# Altium PCB ui_layout-v1.0.0.PcbDoc
Units mm, origin at the board's own origin, x right, y up, seen from the top; angles counter-clockwise.
Board outline 78.99 x 48 mm, 2 copper layers (Top Layer, Bottom Layer); 45 components, 52 nets, 161 pads, 29 vias.
Unrouted connection lines stored in the file: 9.
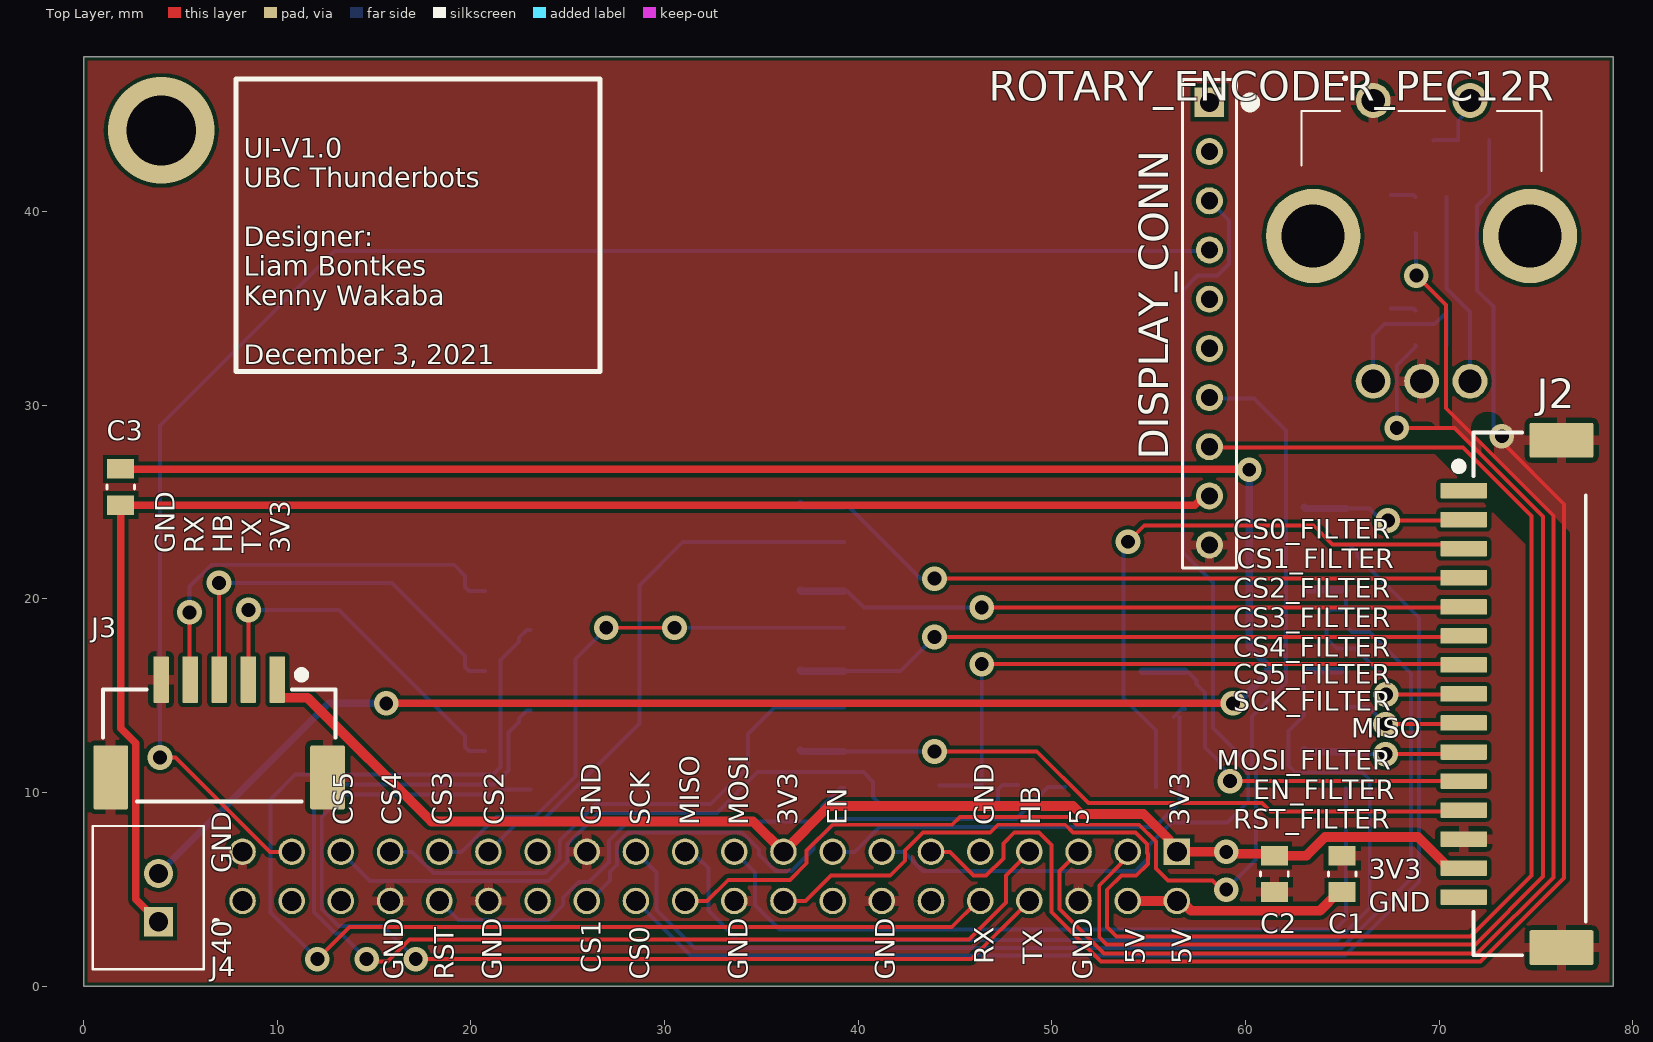
[diagram p0: Top Layer view]
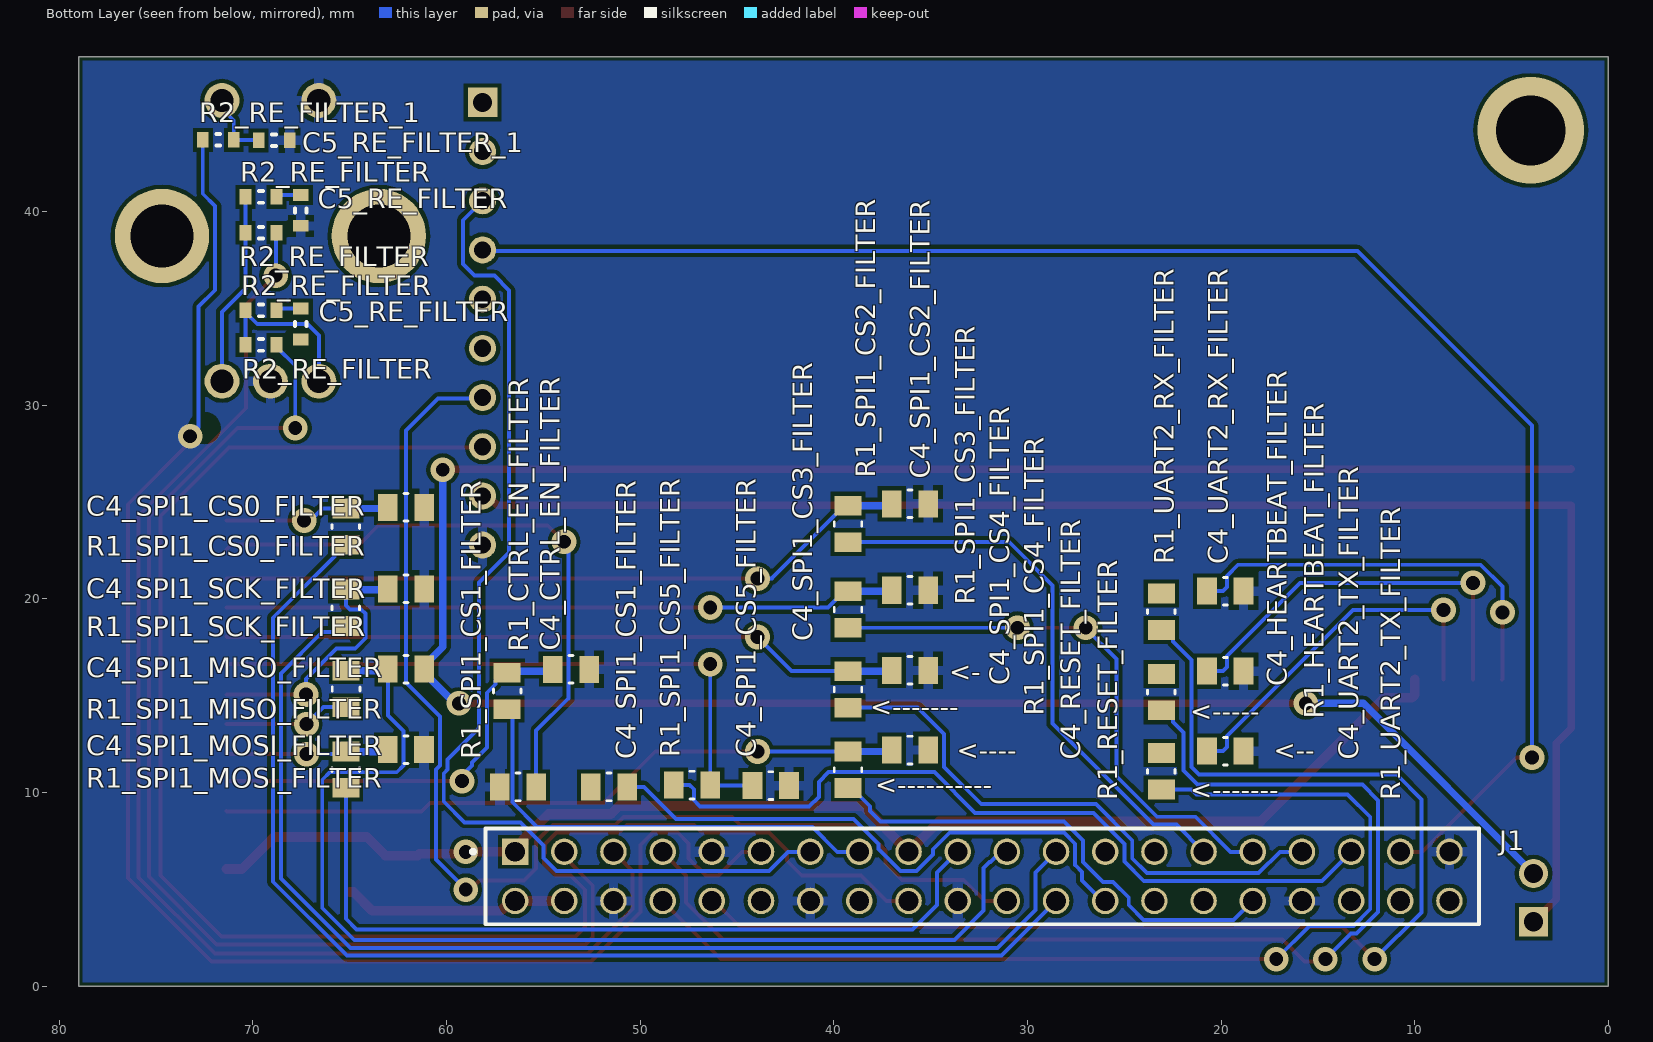
[diagram p1: Bottom Layer view, seen from below]
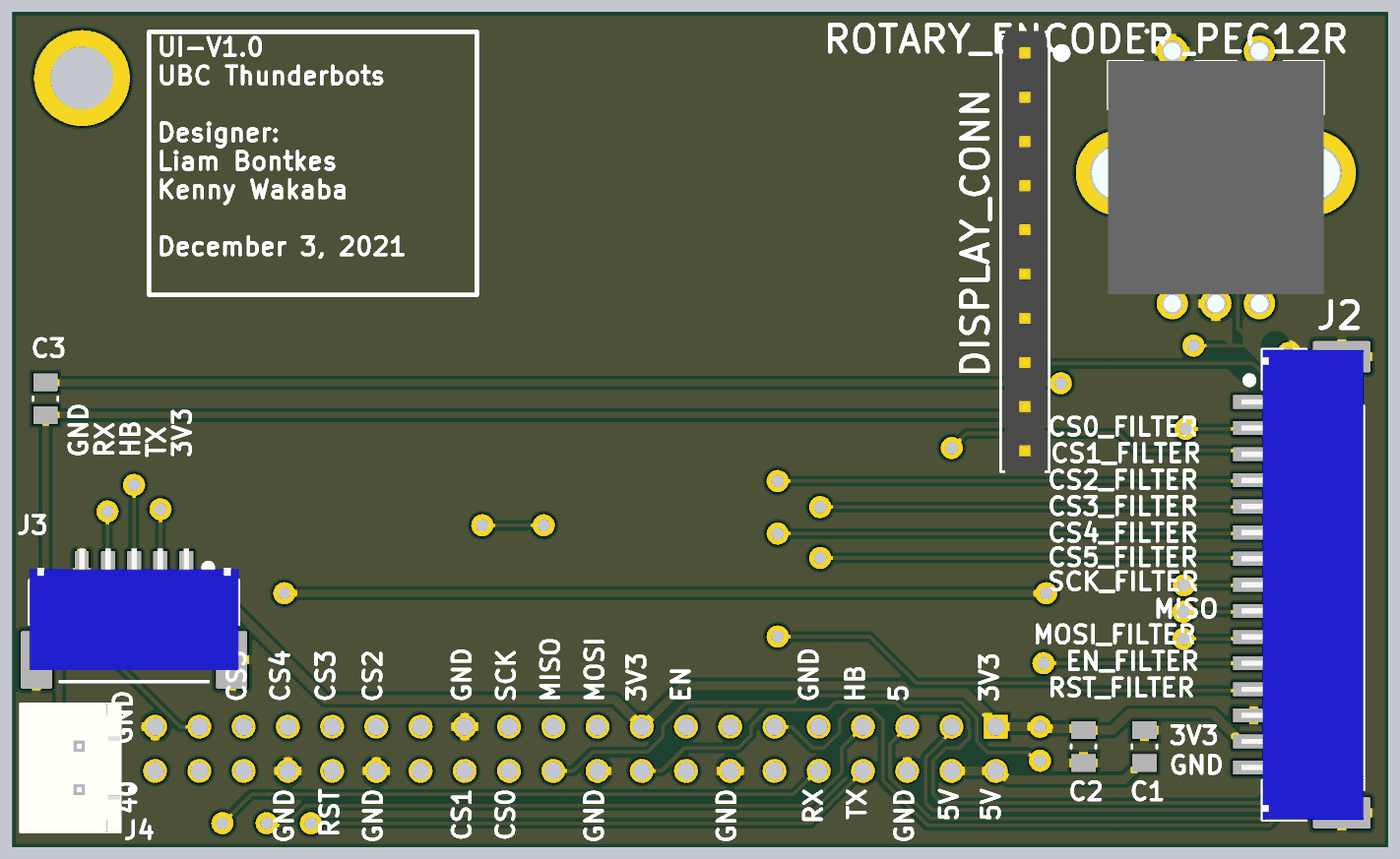
[diagram p2: 3D render of the assembled board from above, using the file's embedded part models]

## Layer stack, top to bottom
Top Solder: solder mask 0.0102, Solder Resist, Dk 3.5
Top Layer: signal copper 0.0356
Dielectric 1: dielectric 0.32, FR-4, Dk 4.8
Bottom Layer: signal copper 0.0356
Bottom Solder: solder mask 0.0102, Solder Resist, Dk 3.5

## Board outline
0,0 0,48 78.994,48 78.994,0

## Design rules (kind name [scope] priority, off if disabled: settings)
BoardOutlineClearance [All] p1: gap=0.2 ignorepadtopadclearanceinfootprint=FALSE except(0.4: Arc-SplitBarrior Arc-SplitContinuation Track-SplitBarrior Track-SplitContinuation SMDPad-SplitBarrior SMDPad-SplitContinuation THPad-SplitBarrior THPad-SplitContinuation Via-SplitBarrior Via-SplitContinuation Fill-SplitBarrior Fill-SplitContinuation Poly-SplitBarrior Poly-SplitContinuation Region-SplitBarrior Region-SplitContinuation Text-SplitBarrior Text-SplitContinuation)
Clearance "Clearance Bottom Layer" [OnLayer('Bottom Layer')] p1: gap=0.203 ignorepadtopadclearanceinfootprint=TRUE except(0.254: Arc-Text Track-Text SMDPad-Text THPad-Text Via-Text Fill-Text Poly-Text Region-Text Text-Text)
Clearance "Clearance Top Layer" [OnLayer('Top Layer')] p2: gap=0.203 ignorepadtopadclearanceinfootprint=TRUE except(0.254: Arc-Text Track-Text SMDPad-Text THPad-Text Via-Text Fill-Text Poly-Text Region-Text Text-Text)
Clearance [All] p3: gap=0.2 ignorepadtopadclearanceinfootprint=TRUE except(0.089: Arc-Arc Arc-Track Arc-SMDPad Track-Track Track-SMDPad SMDPad-SMDPad; 0.127: Arc-Via Track-Via SMDPad-Via THPad-Via Via-Via; 0.254: Arc-Text Track-Text SMDPad-Text THPad-Text Via-Text Fill-Text Poly-Text Region-Text Text-Text)
HoleSize [All] p1: absolutevalues=TRUE maxlimit=6.3 minlimit=0.2 maxpercent=80.000 minpercent=20.000
MinimumAnnularRing [All] p1: minimumring=0.076
MinimumSolderMaskSliver [All] p1: minsoldermaskwidth=0.1
PolygonConnect PolygonConnect_1 [All] p1: thpad.connectstyle=Relief thpad.reliefconductorwidth=0.508 thpad.reliefentries=4 thpad.polygonreliefangle="90 Angle" thpad.airgapwidth=0.254 smdpad.connectstyle=Relief smdpad.reliefconductorwidth=0.508 smdpad.reliefentries=4 smdpad.polygonreliefangle="90 Angle" smdpad.airgapwidth=0.254 via.connectstyle=Direct via.reliefconductorwidth=0.508 via.reliefentries=4 via.polygonreliefangle="90 Angle" via.airgapwidth=0.254
RoomDefinition U_motordriver [InComponentClass('U_motordriver')] p1: confinementstyle=ConfineIn formatcopy=TRUE lockcomponents=FALSE outline 69.621,0.381 69.621,27.989 78.629,27.989 78.629,0.381
RoomDefinition SPI1_CS0_FILTER [InComponentClass('SPI1_CS0_FILTER')] p2: confinementstyle=ConfineIn formatcopy=TRUE lockcomponents=FALSE outline 60.1,21.766 66.4,21.766 66.4,25.908 60.1,25.908
RoomDefinition ROTARY_ENCODER_FILTER [InComponentClass('ROTARY_ENCODER_FILTER')] p3: confinementstyle=ConfineIn formatcopy=TRUE lockcomponents=FALSE outline 73.241,44.501 66.739,44.501 66.739,32.372 73.241,32.372
RoomDefinition U_jetson-nano [InComponentClass('U_jetson-nano')] p4: confinementstyle=ConfineIn formatcopy=TRUE lockcomponents=FALSE outline 6.1,2.6 66.2,2.6 66.2,8.7 6.1,8.7
RoomDefinition RESET_FILTER [InComponentClass('RESET_FILTER')] p5: confinementstyle=ConfineIn formatcopy=TRUE lockcomponents=FALSE outline 34.055,9.169 40.455,9.169 40.455,13.276 34.055,13.276
RoomDefinition UART2_TX_FILTER [InComponentClass('UART2_TX_FILTER')] p6: confinementstyle=ConfineIn formatcopy=TRUE lockcomponents=FALSE outline 17.747,9.182 24.247,9.182 24.247,13.139 17.747,13.139
RoomDefinition SPI1_CS4_FILTER [InComponentClass('SPI1_CS4_FILTER')] p7: confinementstyle=ConfineIn formatcopy=TRUE lockcomponents=FALSE outline 34.06,13.346 40.46,13.346 40.46,17.537 34.06,17.537
RoomDefinition HEARTBEAT_FILTER [InComponentClass('HEARTBEAT_FILTER')] p8: confinementstyle=ConfineIn formatcopy=TRUE lockcomponents=FALSE outline 17.749,13.272 24.249,13.272 24.249,17.268 17.749,17.268
RoomDefinition UART2_RX_FILTER [InComponentClass('UART2_RX_FILTER')] p9: confinementstyle=ConfineIn formatcopy=TRUE lockcomponents=FALSE outline 17.782,17.321 24.282,17.321 24.282,21.478 17.782,21.478
RoomDefinition SPI1_CS3_FILTER [InComponentClass('SPI1_CS3_FILTER')] p10: confinementstyle=ConfineIn formatcopy=TRUE lockcomponents=FALSE outline 34.06,17.588 40.46,17.588 40.46,21.754 34.06,21.754
RoomDefinition SPI1_CS2_FILTER [InComponentClass('SPI1_CS2_FILTER')] p11: confinementstyle=ConfineIn formatcopy=TRUE lockcomponents=FALSE outline 34.055,21.932 40.455,21.932 40.455,25.848 34.055,25.848
RoomDefinition SPI1_CS5_FILTER [InComponentClass('SPI1_CS5_FILTER')] p12: confinementstyle=ConfineIn formatcopy=TRUE lockcomponents=FALSE outline 41.25,9.119 49.326,9.119 49.326,11.582 41.25,11.582
RoomDefinition SPI1_CS1_FILTER [InComponentClass('SPI1_CS1_FILTER')] p13: confinementstyle=ConfineIn formatcopy=TRUE lockcomponents=FALSE outline 58.191,11.519 49.708,11.519 49.708,9.119 58.191,9.119
RoomDefinition SPI1_MOSI_FILTER [InComponentClass('SPI1_MOSI_FILTER')] p14: confinementstyle=ConfineIn formatcopy=TRUE lockcomponents=FALSE outline 60.08,9.216 66.38,9.216 66.38,13.284 60.08,13.284
RoomDefinition CTRL_EN_FILTER [InComponentClass('CTRL_EN_FILTER')] p15: confinementstyle=ConfineIn formatcopy=TRUE lockcomponents=FALSE outline 51.562,13.335 58.062,13.335 58.062,17.46 51.562,17.46
RoomDefinition SPI1_MISO_FILTER [InComponentClass('SPI1_MISO_FILTER')] p16: confinementstyle=ConfineIn formatcopy=TRUE lockcomponents=FALSE outline 60.096,13.326 66.396,13.326 66.396,17.501 60.096,17.501
RoomDefinition SPI1_SCK_FILTER [InComponentClass('SPI1_SCK_FILTER')] p17: confinementstyle=ConfineIn formatcopy=TRUE lockcomponents=FALSE outline 60.095,17.564 66.395,17.564 66.395,21.692 60.095,21.692
RoomDefinition U_power [InComponentClass('U_power')] p18: confinementstyle=ConfineIn formatcopy=TRUE lockcomponents=FALSE outline 0.254,0.278 9.354,0.278 9.354,28.678 0.254,28.678
RoutingCorners [All] p1: cornerstyle=Round minsetback=2.54 maxsetback=2.54
RoutingVias [All] p1: holewidth=0.5 width=1 viastyle="Through Hole" minholewidth=0.2 minwidth=0.45 maxholewidth=1 maxwidth=2
SilkToSilkClearance [All] p1: silktosilkclearance=0.1
SilkToSolderMaskClearance [IsPad] p1: minsilkscreentomaskgap=0.1 clearancetoexposedcopper=TRUE
SolderMaskExpansion [All] p1: expansion=0.102 istentingtop=FALSE
Width [All] p1: maxlimit=2.54 minlimit=0.089 preferedwidth=0.381
25 further rules are at their usual default settings.

## Classes and differential pairs
component class ROTARY_ENCODER_FILTER: C5_RE_FILTER C5_RE_FILTER_1 R2_RE_FILTER R2_RE_FILTER_1
component class "ROTARY ENCODER": ROTARY_ENCODER_PEC12R
channel class low-pass-filter: CTRL_EN_FILTER HEARTBEAT_FILTER RESET_FILTER SPI1_CS0_FILTER SPI1_CS1_FILTER SPI1_CS2_FILTER SPI1_CS3_FILTER SPI1_CS4_FILTER SPI1_CS5_FILTER SPI1_MISO_FILTER SPI1_MOSI_FILTER SPI1_SCK_FILTER UART2_RX_FILTER UART2_TX_FILTER
component class UART2_TX_FILTER: C4_UART2_TX_FILTER R1_UART2_TX_FILTER
component class UART2_RX_FILTER: C4_UART2_RX_FILTER R1_UART2_RX_FILTER
component class U_power: C3 J3 J4
component class U_jetson-nano: C1 C2 J1
component class SPI1_SCK_FILTER: C4_SPI1_SCK_FILTER R1_SPI1_SCK_FILTER
component class SPI1_MOSI_FILTER: C4_SPI1_MOSI_FILTER R1_SPI1_MOSI_FILTER
component class SPI1_MISO_FILTER: C4_SPI1_MISO_FILTER R1_SPI1_MISO_FILTER
component class SPI1_CS5_FILTER: C4_SPI1_CS5_FILTER R1_SPI1_CS5_FILTER
component class SPI1_CS4_FILTER: C4_SPI1_CS4_FILTER R1_SPI1_CS4_FILTER
component class SPI1_CS3_FILTER: C4_SPI1_CS3_FILTER R1_SPI1_CS3_FILTER
component class SPI1_CS2_FILTER: C4_SPI1_CS2_FILTER R1_SPI1_CS2_FILTER
component class SPI1_CS1_FILTER: C4_SPI1_CS1_FILTER R1_SPI1_CS1_FILTER
component class SPI1_CS0_FILTER: C4_SPI1_CS0_FILTER R1_SPI1_CS0_FILTER
component class RESET_FILTER: C4_RESET_FILTER R1_RESET_FILTER
component class HEARTBEAT_FILTER: C4_HEARTBEAT_FILTER R1_HEARTBEAT_FILTER
component class CTRL_EN_FILTER: C4_CTRL_EN_FILTER R1_CTRL_EN_FILTER

## Components (designator, comment, footprint, x,y, rotation, side; value= is the part's Value field where it differs from the comment)
C1 "0.1uF 25V" 0805 65,5.8 r270 top value=0.1uF
C2 "0.1uF 25V" 0805 61.5,5.8 r90 top value=0.1uF
C3 "0.1uF 25V" 0805 1.905,25.781 r270 top value=0.1uF
C4_CTRL_EN_FILTER "100pF 16V" 0805 53.577,16.361 r0 bottom value=100pF (schematic designator C4)
C4_HEARTBEAT_FILTER "100pF 16V" 0805 19.78,16.269 r0 bottom value=100pF (schematic designator C4)
C4_RESET_FILTER "100pF 16V" 0805 36.066,12.196 r0 bottom value=100pF (schematic designator C4)
C4_SPI1_CS0_FILTER "100pF 16V" 0805 62.098,24.73 r0 bottom value=100pF (schematic designator C4)
C4_SPI1_CS1_FILTER "100pF 16V" 0805 56.312,10.287 r180 bottom value=100pF (schematic designator C4)
C4_SPI1_CS2_FILTER "100pF 16V" 0805 36.066,24.913 r0 bottom value=100pF (schematic designator C4)
C4_SPI1_CS3_FILTER "100pF 16V" 0805 36.066,20.449 r0 bottom value=100pF (schematic designator C4)
C4_SPI1_CS4_FILTER "100pF 16V" 0805 36.066,16.307 r0 bottom value=100pF (schematic designator C4)
C4_SPI1_CS5_FILTER "100pF 16V" 0805 43.256,10.363 r0 bottom value=100pF (schematic designator C4)
C4_SPI1_MISO_FILTER "100pF 16V" 0805 62.093,16.372 r0 bottom value=100pF (schematic designator C4)
C4_SPI1_MOSI_FILTER "100pF 16V" 0805 62.103,12.217 r0 bottom value=100pF (schematic designator C4)
C4_SPI1_SCK_FILTER "100pF 16V" 0805 62.098,20.523 r0 bottom value=100pF (schematic designator C4)
C4_UART2_RX_FILTER "100pF 16V" 0805 19.78,20.402 r0 bottom value=100pF (schematic designator C4)
C4_UART2_TX_FILTER "100pF 16V" 0805 19.78,12.136 r0 bottom value=100pF (schematic designator C4)
C5_RE_FILTER "Comment" 0603#1 67.526,34.2 r90 bottom
C5_RE_FILTER "Comment" 0603#2 67.526,40.067 r90 bottom
C5_RE_FILTER_1 "Comment" 0603#3 68.909,43.688 r0 bottom
DISPLAY_CONN "Comment" 1-87224-0_TYC 58.141,45.644 r90 top
J1 "CN HDR 40POS" "CN HDR 40POS 0.1 TH" 32.33,5.67 r0 bottom locked
J2 "Comment" "JST ZE SMT 15POS" 74.027,14.344 r90 top
J3 "CN HDR 5POS" "CN HDR 5POS SMD 1.5MM" 6.995,13.081 r0 top
J4 "CN HDR 2POS JST XH" JST_B2B-XH-A(LF)(SN) 3.332,4.572 r90 top
R1_CTRL_EN_FILTER "160" 0805 56.877,15.25 r270 bottom value=1 (schematic designator R1)
R1_HEARTBEAT_FILTER "160" 0805 23.08,15.183 r270 bottom value=1 (schematic designator R1)
R1_RESET_FILTER "160" 0805 39.266,11.179 r270 bottom value=1 (schematic designator R1)
R1_SPI1_CS0_FILTER "160" 0805 65.198,23.731 r270 bottom value=1 (schematic designator R1)
R1_SPI1_CS1_FILTER "160" 0805 51.612,10.287 r180 bottom value=1 (schematic designator R1)
R1_SPI1_CS2_FILTER "160" 0805 39.266,23.876 r270 bottom value=1 (schematic designator R1)
R1_SPI1_CS3_FILTER "160" 0805 39.266,19.451 r270 bottom value=1 (schematic designator R1)
R1_SPI1_CS4_FILTER "160" 0805 39.266,15.328 r270 bottom value=1 (schematic designator R1)
R1_SPI1_CS5_FILTER "160" 0805 47.32,10.389 r0 bottom value=1 (schematic designator R1)
R1_SPI1_MISO_FILTER "160" 0805 65.193,15.354 r270 bottom value=1 (schematic designator R1)
R1_SPI1_MOSI_FILTER "160" 0805 65.203,11.18 r270 bottom value=1 (schematic designator R1)
R1_SPI1_SCK_FILTER "160" 0805 65.198,19.544 r270 bottom value=1 (schematic designator R1)
R1_UART2_RX_FILTER "160" 0805 23.08,19.34 r270 bottom value=1 (schematic designator R1)
R1_UART2_TX_FILTER "160" 0805 23.08,11.099 r270 bottom value=1 (schematic designator R1)
R2_RE_FILTER "Comment" 0603#4 69.583,40.767 r180 bottom
R2_RE_FILTER "Comment" 0603#5 69.583,38.913 r180 bottom
R2_RE_FILTER "Comment" 0603#5 69.583,33.122 r180 bottom
R2_RE_FILTER "Comment" 0603#6 69.583,34.9 r180 bottom
R2_RE_FILTER_1 "Comment" 0603#7 71.793,43.713 r180 bottom
ROTARY_ENCODER_PEC12R "Comment" PEC12R4220FS0024 66.599,45.745 r0 top

## Footprints (in the part's own frame and the unit in brackets; to place one, negate y for a bottom-side part, rotate by r counter-clockwise, add the part's x,y. Pads: shape width x height; smd on the part's side, far side on the other; paste and mask are expansions set on the pad)
1-87224-0_TYC [mil]
  round 55 hole 35 mask+0: CARD_CD(-500,0) D/C(-600,0) GND(-900,0) MISO(-100,0) MOSI(-300,0) RESET(-700,0) SCK(-200,0) TFT_CS(-400,0) VCC(-800,0)
  rect 60x60 hole 38 mask+0: LITE(0,0)
  silkscreen extent -947,-93 47,55, body extent -950,-50 50,50, height 90
0603#1 [mm] "Chip Resistor, 2-Leads, Body 1.60x0.80mm, IPC High Density"
  rect 0.6x0.8 smd: 1(-0.8,0) C5(0.8,0)
  silkscreen extent -0.1,-0.3 0.1,0.3, body extent -0.8,-0.4 0.8,0.4, height 0.6
0603#2 [mm] "Chip Resistor, 2-Leads, Body 1.60x0.80mm, IPC High Density"
  rect 0.6x0.8 smd: 1(-0.8,0) C5-1(0.8,0)
  silkscreen extent -0.1,-0.3 0.1,0.3, body extent -0.8,-0.4 0.8,0.4, height 0.6
0603#3 [mm] "Chip Resistor, 2-Leads, Body 1.60x0.80mm, IPC High Density"
  rect 0.6x0.8 smd: 1(-0.8,0) C5-2(0.8,0)
  silkscreen extent -0.1,-0.3 0.1,0.3, body extent -0.8,-0.4 0.8,0.4, height 0.6
0603#4 [mm] "Chip Resistor, 2-Leads, Body 1.60x0.80mm, IPC High Density"
  rect 0.6x0.8 smd: 1(-0.8,0) R2-1(0.8,0)
  silkscreen extent -0.1,-0.3 0.1,0.3, body extent -0.8,-0.4 0.8,0.4, height 0.6
0603#5 [mm] "Chip Resistor, 2-Leads, Body 1.60x0.80mm, IPC High Density"
  rect 0.6x0.8 smd: 1(-0.8,0) 2(0.8,0)
  silkscreen extent -0.1,-0.3 0.1,0.3, body extent -0.8,-0.4 0.8,0.4, height 0.6
0603#6 [mm] "Chip Resistor, 2-Leads, Body 1.60x0.80mm, IPC High Density"
  rect 0.6x0.8 smd: 1(-0.8,0) R2(0.8,0)
  silkscreen extent -0.1,-0.3 0.1,0.3, body extent -0.8,-0.4 0.8,0.4, height 0.6
0603#7 [mm] "Chip Resistor, 2-Leads, Body 1.60x0.80mm, IPC High Density"
  rect 0.6x0.8 smd: 1(-0.8,0) R2-2(0.8,0)
  silkscreen extent -0.1,-0.3 0.1,0.3, body extent -0.8,-0.4 0.8,0.4, height 0.6
0805 [mil]
  rect 40x55 smd: 1(-37,0) 2(37,0)
  silkscreen extent -4,-28 4,28, body extent -47,-28 47,28, height 24
"CN HDR 5POS SMD 1.5MM" [mm] "Connector Header Surface Mount 5 position 0.059\" (1.50mm)"
  rrect10% 1.8x3.3 smd: 0(-5.6,-2.3) 0(5.6,-2.3)
  rrect10% 0.8x2.4 smd: 1(3,2.75) 2(1.5,2.75) 3(0,2.75) 4(-1.5,2.75) 5(-3,2.75)
  silkscreen extent -6,-3.55 6,3, body extent -6,-2.9 6,4.1, height 7.51
"CN HDR 40POS 0.1 TH" [mm] "40 Position Header Connector 0.100\" (2.54mm) Through Hole"
  rect 1.37x1.37 hole 1.02: 01(24.13,-1.27)
  round 1.37 hole 1.02: 02(24.13,1.27) 03(21.59,-1.27) 04(21.59,1.27) 05(19.05,-1.27) 06(19.05,1.27) 07(16.51,-1.27) 08(16.51,1.27) 09(13.97,-1.27) 10(13.97,1.27) 11(11.43,-1.27) "12 "(11.43,1.27) 13(8.89,-1.27) 14(8.89,1.27) 15(6.35,-1.27) 16(6.35,1.27) 17(3.81,-1.27) 18(3.81,1.27) 19(1.27,-1.27) 20(1.27,1.27) 21(-1.27,-1.27) 22(-1.27,1.27) 23(-3.81,-1.27) 24(-3.81,1.27) 25(-6.35,-1.27) 26(-6.35,1.27) 27(-8.89,-1.27) 28(-8.89,1.27) 29(-11.43,-1.27) 30(-11.43,1.27) 31(-13.97,-1.27) 32(-13.97,1.27) 33(-16.51,-1.27) 34(-16.51,1.27) 35(-19.05,-1.27) 36(-19.05,1.27) 37(-21.59,-1.27) 38(-21.59,1.27) 39(-24.13,-1.27) 40(-24.13,1.27)
  silkscreen extent -25.65,-2.48 26.4,2.47
"JST ZE SMT 15POS" [mm] "15 POS HDR JST ZE"
  rrect10% 1.8x3.3 smd: 0(-12.35,-2.3) 0(13.85,-2.3)
  rrect10% 0.8x2.4 smd: 1(11.25,2.75) 2(9.75,2.75) 3(8.25,2.75) 4(6.75,2.75) 5(5.25,2.75) 6(3.75,2.75) 7(2.25,2.75) 8(0.75,2.75) 9(-0.75,2.75) 10(-2.25,2.75) 11(-3.75,2.75) 12(-5.25,2.75) 13(-6.75,2.75) 14(-8.25,2.75) 15(-9.75,2.75)
  silkscreen extent -12.75,-3.55 14.26,3, body extent -12.75,-3.55 14.25,3.45, height 7.6
JST_B2B-XH-A(LF)(SN) [mm]
  rect 1.508x1.508 hole 1: 1(-1.25,-0.525)
  round 1.508 hole 1: 2(1.25,-0.525)
  silkscreen extent -3.7,-3.6 3.7,2.88, body extent -3.7,-2.85 3.7,2.9, height 7.1
PEC12R4220FS0024 [mm]
  round 1.8 hole 1.2: 1(0,0) 2(5,0) A1(0,-14.5) B1(5,-14.5) C1(2.5,-14.5)
  round 4.875 hole 3.25: MH1(8.1,-7) MH2(-3.1,-7)
  silkscreen extent -3.7,-3.65 8.7,1.2, body extent -4.61,-15 9.62,0.5, height 20.1

## Part data
C1 C2 C3: library part "CAP 0.1uF 25V", "Default Symbol for Capacitors", Operating Temperature="-55°C ~ 125°C", Rating=25V, Temperature Coefficient=X7R, Tolerance=10%, Part Number="CAP 0.1uF 25V"
C4_CTRL_EN_FILTER C4_HEARTBEAT_FILTER C4_RESET_FILTER C4_SPI1_CS0_FILTER C4_SPI1_CS1_FILTER C4_SPI1_CS2_FILTER C4_SPI1_CS3_FILTER C4_SPI1_CS4_FILTER C4_SPI1_CS5_FILTER C4_SPI1_MISO_FILTER C4_SPI1_MOSI_FILTER C4_SPI1_SCK_FILTER C4_UART2_RX_FILTER C4_UART2_TX_FILTER: library part "CAP 100pF 16V", "Default Symbol for Capacitors", Operating Temperature="-55°C ~ 125°C", Rating=16V, Temperature Coefficient=X5R, Tolerance=10%, Part Number="CAP 100pF 16V"
C5_RE_FILTER C5_RE_FILTER C5_RE_FILTER_1: library part "CAP 0.010uF 16V"
DISPLAY_CONN: library part "CONN HEADER VERT 10POS"
J1: "40 Position Header Connector", Supplier Part Number 1=S6104-ND, Part Number="CN HDR 40POS", Pin Count=40, Supplier 1=Digi-Key, Supplier URL 1=https://www.digikey.ca/en/products/detail/sullins-connector-solutions/PPTC202LFBN-RC/807240?s=N4IgTCBcDaIMoDYCMAGALAWgHIBEQF0BfIA
J2: library part "CN 15POS JST ZE SMT"
J3: "Connector Header 5 Position", Supplier Part Number 1=455-2383-1-ND, Part Number="CN HDR 5POS", Pin Count=5, Supplier 1=Digi-Key, Supplier URL 1=https://www.digikey.ca/en/products/detail/jst-sales-america-inc/BM05B-ZESS-TBT-LF-SN/1886989?s=N4IgTCBcDaICwFYEFowGYAcbkEZkDkAREAXQF8g
J4: "Connector Header Through Hole 2 position 0.098 _2.50mm_ / JST XH", Package=None, MF="JST Sales", MP=B2B-XH-A_LF__SN_, Part Number="CN HDR 2POS JST XH", Pin Count=2, Price=None, SnapEDA_Link=https://www.snapeda.com/parts/B2B-XH-A%28LF%29%28SN%29/JST%20Sales%20America%20Inc./view-part/492310/?ref=snap
R1_CTRL_EN_FILTER R1_HEARTBEAT_FILTER R1_RESET_FILTER R1_SPI1_CS0_FILTER R1_SPI1_CS1_FILTER R1_SPI1_CS2_FILTER R1_SPI1_CS3_FILTER R1_SPI1_CS4_FILTER R1_SPI1_CS5_FILTER R1_SPI1_MISO_FILTER R1_SPI1_MOSI_FILTER R1_SPI1_SCK_FILTER R1_UART2_RX_FILTER R1_UART2_TX_FILTER: library part "RES 160.0 1/8W", "Default Resistor Symbol", Package=0805, Power (Watts)=0.125W, Tolerance=5%, Part Number="RES 160.0 1/8W"
R2_RE_FILTER R2_RE_FILTER R2_RE_FILTER R2_RE_FILTER R2_RE_FILTER_1: library part "RES 10k 1/8W - 1%"

## Via types
v1: diameter 1.27, hole 0.711, Top Layer to Bottom Layer, 28 vias
v2: diameter 5.5, hole 3.6, Top Layer to Bottom Layer, 1 vias

## Nets (pads, with @x,y where several pads share a name; then routed paths per layer and width w, separated by ;. In a path a pad name is that pad's centre, name@x,y a point inside that pad or via, vN(x,y) a via of type N, cw(c..) or ccw(c..) an arc to the next point about the centre after c; other vN are vias at no path point)
CTRL_EN: J1.15 R1_CTRL_EN_FILTER.2 | length 24.1
  Bottom Layer w0.203: J1.15 39.82,6.94 41.11,8.23 55.321,8.23 56.591,9.5 R1_CTRL_EN_FILTER.2@56.591,13.893 ; R1_CTRL_EN_FILTER.2@56.299,13.904 56.706,14.311 R1_CTRL_EN_FILTER.2
CTRL_EN_FILTER: C4_CTRL_EN_FILTER.2 J2.11 R1_CTRL_EN_FILTER.1 | length 21
  Top Layer w0.203: v1(59.206,10.592) 71.326,10.592 J2.11@71.368,10.55
  Bottom Layer w0.203: R1_CTRL_EN_FILTER.1 57.067,16.19 57.474,15.784 57.474,15.593 57.912,15.155 57.912,12.319 58.686,11.545 58.686,11.4 59.206,10.881 v1(59.206,10.592)
  Bottom Layer w0.381: C4_CTRL_EN_FILTER.2@54.668,16.267 R1_CTRL_EN_FILTER.1@56.858,16.267
HEARTBEAT: J1.07 R1_HEARTBEAT_FILTER.2 | length 61.3
  Top Layer w0.203: v1@14.605,1.27 15.689,1.27 16.832,2.413 45.72,2.413 47.625,4.318 47.625,5.725 J1.07
  Bottom Layer w0.203: v1(14.605,1.397) 13.291,2.711 12.994,2.711 11.884,3.822 11.884,9.598 12.7,10.414 21.209,10.414 21.939,11.143 21.939,13.103 22.483,13.647 22.483,13.837 22.889,14.244 R1_HEARTBEAT_FILTER.2
HEARTBEAT_FILTER: C4_HEARTBEAT_FILTER.2 J3.3 R1_HEARTBEAT_FILTER.1 | length 21
  Top Layer w0.203: v1(6.985,20.828) 6.985,15.841 J3.3
  Bottom Layer w0.203: v1(6.985,20.828) 15.919,20.828 19.691,17.056 19.691,16.486 19.907,16.269 C4_HEARTBEAT_FILTER.2
I2C_1_SCL: J1.28
I2C_1_SDA: J1.27
I2C_2_SCL: J1.05 R2_RE_FILTER.2@68.783,38.913 | length 67.7
  Top Layer w0.203: J1.05 50.39,5.95 50.39,3.99 52.704,1.676 71.968,1.676 75.913,5.621 75.913,24.296 70.358,29.851 70.358,35.179 v1(68.834,36.703)
  Bottom Layer w0.203: R2_RE_FILTER.2@68.783,38.913 68.809,38.888 68.809,36.728 v1(68.834,36.703)
I2C_2_SDA: J1.03 R2_RE_FILTER.2@68.783,33.122 | length 62.3
  Top Layer w0.203: J1.03 53.92,6.676 52.451,5.207 52.451,2.54 52.832,2.159 71.876,2.159 75.372,5.654 75.372,24.263 70.805,28.829 v1(67.818,28.829)
  Bottom Layer w0.203: v1(67.818,28.829) 67.818,32.056 68.783,33.022 R2_RE_FILTER.2@68.783,33.122
I2S_4_SCLK: "J1.12 "
I2S_4_SDIN: J1.38
I2S_4_SDOUT: J1.40
JETSON_3V3: C2.2 J1.01 J1.17 J2.14 J3.1 | length 68.8
  Top Layer w0.508: J3.1 9.995,15.041 10.141,14.895 11.565,14.895 17.951,8.509 34.571,8.509 J1.17 38.501,9.301 51.093,9.301 51.499,8.895 54.73,8.895 56.029,7.595 56.029,7.371 J1.01 58.998,6.94 v1(59.004,6.934) 59.101,6.837 61.403,6.837 C2.2 63.147,6.74 64.112,7.705 68.913,7.705 70.568,6.05 J2.14@71.368,6.05
JETSON_5V: C1.2 J1.02 J1.04 | length 11.7
  Top Layer w0.508: J1.04 56.684,4.4 57.189,3.895 63.844,3.895 64.81,4.86 C1.2
JETSON_GND: C1.1 C2.1 C4_CTRL_EN_FILTER.1 C4_HEARTBEAT_FILTER.1 C4_RESET_FILTER.1 C4_SPI1_CS0_FILTER.1 C4_SPI1_CS1_FILTER.1 C4_SPI1_CS2_FILTER.1 C4_SPI1_CS3_FILTER.1 C4_SPI1_CS4_FILTER.1 C4_SPI1_CS5_FILTER.1 C4_SPI1_MOSI_FILTER.1 C4_SPI1_SCK_FILTER.1 C4_UART2_RX_FILTER.1 C4_UART2_TX_FILTER.1 C5_RE_FILTER.1 C5_RE_FILTER_1.1 DISPLAY_CONN.GND J1.06 J1.09 J1.14 J1.20 J1.25 J1.30 J1.34 J1.39 J2.0 J2.13 J3.0 J3.5 ROTARY_ENCODER_PEC12R.1 ROTARY_ENCODER_PEC12R.C1
NetJ2_8: J2.9 R1_SPI1_MISO_FILTER.2 | length 6.5
  Top Layer w0.203: v1(67.234,13.538) 71.356,13.538 J2.9@71.368,13.55
  Bottom Layer w0.203: R1_SPI1_MISO_FILTER.2 66.358,14.414 v1(67.234,13.538)
POWER_5V: C3.2 DISPLAY_CONN.VCC J4.1 | length 78.8
  Top Layer w0.381: J4.1 2.689,4.49 2.689,12.541 1.905,13.325 C3.2 57.383,24.841 57.866,25.324 DISPLAY_CONN.VCC
POWER_GND: C3.1 C4_SPI1_MISO_FILTER.1 J4.2 | length 130.8
  Top Layer w0.381: C3.1 1.93,26.695 60.173,26.695 v1(60.198,26.67) ; v1(15.621,14.605) v1(59.36,14.605)
  Bottom Layer w0.381: J4.2 12.64,14.605 v1(15.621,14.605) ; v1(59.36,14.605) 59.578,14.605 61.154,16.181 61.154,16.562 60.198,17.518 v1(60.198,26.67)
RESET: J1.32 R1_RESET_FILTER.2 | length 25.2
  Bottom Layer w0.203: J1.32 19.35,3.41 23.992,3.41 24.765,4.183 24.765,4.585 25.57,5.39 26.091,5.39 27.124,6.423 27.124,7.518 28.115,8.509 37.592,8.509 38.131,9.048 38.131,9.294 39.076,10.239 R1_RESET_FILTER.2
RESET_FILTER: C4_RESET_FILTER.2 J2.12 R1_RESET_FILTER.1 | length 35.7
  Top Layer w0.203: v1(43.942,12.118) 49.223,12.118 51.888,9.453 60.86,9.453 61.297,9.017 71.335,9.017 J2.12@71.368,9.05
  Bottom Layer w0.203: R1_RESET_FILTER.1 v1(43.942,12.118)
  Bottom Layer w0.381: C4_RESET_FILTER.2 37.084,12.118 R1_RESET_FILTER.1
ROTARY_ENCODER_FILTER: C5_RE_FILTER.C5-1 R2_RE_FILTER.R2-1 | length 1.3
  Bottom Layer w0.203: C5_RE_FILTER.C5-1 68.683,40.867 R2_RE_FILTER.R2-1
ROTARY_ENCODER_FILTER-1: C5_RE_FILTER.C5 R2_RE_FILTER.R2 | length 1.3
  Bottom Layer w0.203: C5_RE_FILTER.C5 68.683,35 R2_RE_FILTER.R2
ROTARY_ENCODER_FILTER_A1: R2_RE_FILTER.1@70.383,33.122 R2_RE_FILTER.1@70.383,34.9 ROTARY_ENCODER_PEC12R.A1 | length 8.4
  Bottom Layer w0.203: ROTARY_ENCODER_PEC12R.A1 66.599,33.603 67.19,34.195 69.779,34.195 R2_RE_FILTER.1@70.383,34.8 ; R2_RE_FILTER.1@70.383,33.122 R2_RE_FILTER.1@70.383,34.8 ; R2_RE_FILTER.1@70.383,34.9 R2_RE_FILTER.1@70.383,34.8
ROTARY_ENCODER_FILTER_B1: R2_RE_FILTER.1@70.383,38.913 R2_RE_FILTER.1@70.383,40.767 ROTARY_ENCODER_PEC12R.B1 | length 10
  Bottom Layer w0.203: R2_RE_FILTER.1@70.383,40.767 70.383,38.913 70.383,36.031 71.599,34.815 ROTARY_ENCODER_PEC12R.B1
ROTARY_ENCODER_PUSH_BUTTON_FILTER: C5_RE_FILTER_1.C5-2 R2_RE_FILTER_1.R2-2 ROTARY_ENCODER_PEC12R.2 | length 3.6
  Bottom Layer w0.203: C5_RE_FILTER_1.C5-2 69.734,43.713 R2_RE_FILTER_1.R2-2 70.993,44.708 71.599,45.313 ROTARY_ENCODER_PEC12R.2
SPI_1_CS0: J1.24 R1_SPI1_CS0_FILTER.2 | length 62.3
  Bottom Layer w0.203: J1.24 31.345,1.575 65.142,1.575 68.961,5.395 68.961,19.028 65.795,22.195 65.795,22.385 65.388,22.792 R1_SPI1_CS0_FILTER.2
SPI_1_CS0_FILTER: C4_SPI1_CS0_FILTER.2 J2.2 R1_SPI1_CS0_FILTER.1 | length 8.6
  Top Layer w0.203: v1(67.361,24.054) 71.364,24.054 J2.2@71.368,24.05
  Bottom Layer w0.203: R1_SPI1_CS0_FILTER.1 66.413,24.671 67.031,24.054 v1(67.361,24.054)
  Bottom Layer w0.381: C4_SPI1_CS0_FILTER.2 63.096,24.671 R1_SPI1_CS0_FILTER.1
SPI_1_CS1: J1.26 R1_SPI1_CS1_FILTER.2 | length 30
  Bottom Layer w0.203: J1.26 26.117,4.4 27.178,5.461 27.178,5.902 27.53,6.255 27.53,7.35 28.11,7.93 34.01,7.93 34.87,7.07 34.87,6.81 35.73,5.95 36.55,5.95 37.69,7.09 37.69,7.35 38.976,8.636 48.145,8.636 49.796,10.287 R1_SPI1_CS1_FILTER.2
SPI_1_CS1_FILTER: C4_SPI1_CS1_FILTER.2 J2.3 R1_SPI1_CS1_FILTER.1 | length 31.7
  Top Layer w0.203: v1(53.936,22.95) 54.773,23.787 63.528,23.787 64.507,22.808 71.109,22.808 J2.3@71.368,22.55
  Bottom Layer w0.203: v1(53.936,22.95) 53.936,22.661 53.704,22.429 53.704,14.869 55.372,13.201 C4_SPI1_CS1_FILTER.2
SPI_1_CS2: J1.29 R1_SPI1_CS2_FILTER.2 | length 29.2
  Bottom Layer w0.203: J1.29 22.304,8.344 23.477,8.344 28.702,13.57 28.702,20.701 30.938,22.937 R1_SPI1_CS2_FILTER.2
SPI_1_CS2_FILTER: C4_SPI1_CS2_FILTER.2 J2.4 R1_SPI1_CS2_FILTER.1 | length 36
  Top Layer w0.203: v1(43.942,21.05) J2.4@71.368,21.05
  Bottom Layer w0.203: R1_SPI1_CS2_FILTER.1 39.457,24.816 43.191,21.082 43.191,21.05 v1(43.942,21.05)
  Bottom Layer w0.381: C4_SPI1_CS2_FILTER.2 37.103,24.816 R1_SPI1_CS2_FILTER.1
SPI_1_CS3: J1.31 R1_SPI1_CS3_FILTER.2 | length 29.2
  Top Layer w0.203: v1(26.987,18.511) v1(30.511,18.511)
  Bottom Layer w0.203: J1.31 19.5,6.94 21.311,8.751 23.308,8.751 25.4,10.842 25.4,16.891 v1@26.987,18.479 ; v1(30.511,18.511) R1_SPI1_CS3_FILTER.2
SPI_1_CS3_FILTER: C4_SPI1_CS3_FILTER.2 J2.5 R1_SPI1_CS3_FILTER.1 | length 34.7
  Top Layer w0.203: v1(46.38,19.558) 71.36,19.558 J2.5@71.368,19.55
  Bottom Layer w0.203: R1_SPI1_CS3_FILTER.1 39.457,20.391 40.289,19.558 v1(46.38,19.558)
  Bottom Layer w0.381: C4_SPI1_CS3_FILTER.2 37.065,20.391 R1_SPI1_CS3_FILTER.1
SPI_1_CS4: J1.33 R1_SPI1_CS4_FILTER.2 | length 29
  Bottom Layer w0.203: J1.33 16.96,6.94 18.058,5.842 23.822,5.842 24.584,6.604 24.584,7.518 26.464,9.398 32.385,9.398 34.314,11.327 34.314,13.021 35.681,14.388 R1_SPI1_CS4_FILTER.2
SPI_1_CS4_FILTER: C4_SPI1_CS4_FILTER.2 J2.6 R1_SPI1_CS4_FILTER.1 | length 35.1
  Top Layer w0.203: v1(43.942,18.034) 71.352,18.034 J2.6@71.368,18.05
  Bottom Layer w0.203: R1_SPI1_CS4_FILTER.1 42.176,16.268 v1(43.942,18.034)
  Bottom Layer w0.381: C4_SPI1_CS4_FILTER.2 37.046,16.268 R1_SPI1_CS4_FILTER.1
SPI_1_CS5: J1.35 R1_SPI1_CS5_FILTER.2 | length 40.4
  Bottom Layer w0.203: J1.35 14.784,5.436 23.99,5.436 24.99,6.436 24.99,7.35 26.594,8.954 32.703,8.954 34.8,11.051 40.265,11.051 40.767,10.549 40.767,9.779 41.275,9.271 46.9,9.271 47.231,9.602 47.231,10.172 47.447,10.389 R1_SPI1_CS5_FILTER.2
SPI_1_CS5_FILTER: C4_SPI1_CS5_FILTER.2 J2.7 R1_SPI1_CS5_FILTER.1 | length 33.5
  Top Layer w0.203: v1(46.38,16.637) 71.281,16.637 J2.7@71.368,16.55
  Bottom Layer w0.203: C4_SPI1_CS5_FILTER.2 R1_SPI1_CS5_FILTER.1@46.38,10.363 ; R1_SPI1_CS5_FILTER.1 v1(46.38,16.637)
SPI_1_MISO: C4_SPI1_MISO_FILTER.2 J1.21 R1_SPI1_MISO_FILTER.1 | length 57.7
  Bottom Layer w0.203: J1.21 31.376,6.94 31.909,6.406 31.948,6.406 32.258,6.096 32.258,3.903 33.773,2.388 64.77,2.388 66.421,4.039 66.421,10.66 66.028,11.053 64.378,11.053 64.374,11.049 62.574,11.049 62.23,11.393 62.23,13.182 63.033,13.985 C4_SPI1_MISO_FILTER.2
  Bottom Layer w0.381: C4_SPI1_MISO_FILTER.2@63.111,16.294 R1_SPI1_MISO_FILTER.1
SPI_1_MOSI: J1.19 R1_SPI1_MOSI_FILTER.2 | length 41.2
  Bottom Layer w0.203: J1.19 34.671,5.869 34.671,4.191 35.941,2.921 64.643,2.921 65.203,3.481 R1_SPI1_MOSI_FILTER.2
SPI_1_MOSI_FILTER: C4_SPI1_MOSI_FILTER.2 J2.10 R1_SPI1_MOSI_FILTER.1 | length 8.4
  Top Layer w0.203: v1(67.234,11.989) 71.307,11.989 J2.10@71.368,12.05
  Bottom Layer w0.203: R1_SPI1_MOSI_FILTER.1 65.334,11.989 v1(67.234,11.989)
  Bottom Layer w0.381: C4_SPI1_MOSI_FILTER.2@63.038,12.214 63.135,12.116 R1_SPI1_MOSI_FILTER.1@65.198,12.116
SPI_1_SCK: J1.23 R1_SPI1_SCK_FILTER.2 | length 59.7
  Bottom Layer w0.203: J1.23 29.591,5.869 29.591,3.937 31.546,1.982 64.974,1.982 68.555,5.563 68.555,16.154 66.421,18.288 65.514,18.288 R1_SPI1_SCK_FILTER.2
SPI_1_SCK_FILTER: C4_SPI1_SCK_FILTER.2 J2.8 R1_SPI1_SCK_FILTER.1 | length 14.3
  Top Layer w0.203: v1(67.259,15.062) 71.356,15.062 J2.8@71.368,15.05
  Bottom Layer w0.203: R1_SPI1_SCK_FILTER.1 65.198,19.671 64.981,19.455 64.411,19.455 64.195,19.238 64.195,17.97 64.716,17.449 65.676,17.449 67.259,15.865 v1(67.259,15.062)
  Bottom Layer w0.381: C4_SPI1_SCK_FILTER.2 63.077,20.484 R1_SPI1_SCK_FILTER.1
SPI_2_CS0: DISPLAY_CONN.RESET J1.18 | length 86.9
  Top Layer w0.203: J1.18 37.28,4.4 38.595,5.715 41.656,5.715 42.418,6.477 42.418,6.998 43.35,7.93 46.818,7.93 47.225,8.336 50.693,8.336 51.099,7.93 54.33,7.93 54.91,7.35 54.91,6.881 54.966,6.825 54.966,6.317 54.36,5.711 53.59,5.711 52.857,4.978 52.857,3.048 53.34,2.565 71.628,2.565 74.778,5.715 74.778,24.282 71.247,27.813 58.191,27.813 DISPLAY_CONN.RESET
SPI_2_CS1: J1.16
SPI_2_MISO: DISPLAY_CONN.D/C J1.22 | length 62.4
  Top Layer w0.203: J1.22 32.2,4.4 33.287,5.487 36.475,5.487 37.338,6.35 37.338,6.998 38.676,8.336 44.849,8.336 45.255,8.742 50.861,8.742 51.268,8.336 54.498,8.336 55.372,7.462 55.372,6.088 55.999,5.461 58.292,5.461 58.766,4.987 v1(59.004,4.987) v1@59.055,4.987
  Bottom Layer w0.203: DISPLAY_CONN.D/C 58.191,30.353 60.452,30.353 62.103,28.702 62.103,15.684 60.35,13.931 60.35,11.393 60.552,11.192 60.552,6.535 v1(59.004,4.987)
SPI_2_MOSI: DISPLAY_CONN.MOSI J1.37 | length 83.9
  Top Layer w0.203: v1(3.937,11.811) 4.745,11.811 9.616,6.94 J1.37
  Bottom Layer w0.203: v1(3.937,11.811) 3.937,28.956 12.954,37.973 58.09,37.973 DISPLAY_CONN.MOSI
SPI_2_SCK: DISPLAY_CONN.SCK J1.13 | length 55.6
  Bottom Layer w0.203: J1.13 42.36,6.94 43.35,5.95 54.33,5.95 54.989,6.61 54.989,7.27 56.18,8.461 59.068,8.461 60.145,9.539 60.145,10.981 59.944,11.182 59.944,11.709 58.318,13.335 58.318,20.853 56.769,22.402 56.769,35.941 57.531,36.703 58.555,36.703 59.144,37.292 59.144,39.561 DISPLAY_CONN.SCK
UART_2_CTS: J1.36
UART_2_RTS: J1.11 R2_RE_FILTER_1.1 | length 81.4
  Top Layer w0.203: J1.11 43.78,6.92 44.749,6.92 45.955,5.715 46.609,5.715 47.498,6.604 47.498,7.366 48.062,7.93 49.347,7.93 49.984,7.293 49.984,3.822 52.536,1.27 72.136,1.27 76.454,5.588 76.454,24.892 73.249,28.097 v1(73.249,28.406)
  Bottom Layer w0.203: R2_RE_FILTER_1.1 72.593,40.93 71.957,40.293 71.957,35.943 72.803,35.096 72.803,28.852 v1(73.249,28.406)
UART_2_RX: J1.10 R1_UART2_RX_FILTER.2 | length 65.1
  Top Layer w0.203: v1(12.065,1.397) 13.716,3.048 44.831,3.048 46.183,4.4 J1.10
  Bottom Layer w0.203: v1(12.065,1.397) 9.652,3.81 9.652,9.652 10.922,10.922 21.143,10.922 21.532,11.312 21.532,16.853 22.483,17.803 22.483,17.994 22.889,18.4 R1_UART2_RX_FILTER.2
UART_2_RX_FILTER: C4_UART2_RX_FILTER.2 J3.4 R1_UART2_RX_FILTER.1 | length 21.4
  Top Layer w0.203: v1(5.461,19.304) 5.461,15.865 J3.4
  Bottom Layer w0.203: v1(5.461,19.304) 5.461,20.633 6.596,21.768 19.111,21.768 19.691,21.188 19.691,20.618 19.907,20.402 C4_UART2_RX_FILTER.2
UART_2_TX: J1.08 R1_UART2_TX_FILTER.2 | length 55
  Top Layer w0.203: v1(17.145,1.397) 45.837,1.397 J1.08
  Bottom Layer w0.203: v1(17.145,1.397) 15.424,3.118 13.163,3.118 12.29,3.99 12.29,8.734 13.462,9.906 21.276,9.906 21.529,10.16 R1_UART2_TX_FILTER.2
UART_2_TX_FILTER: C4_UART2_TX_FILTER.2 J3.2 R1_UART2_TX_FILTER.1 | length 19.2
  Top Layer w0.203: J3.2 8.509,15.845 v1(8.509,19.431)
  Bottom Layer w0.203: v1(8.509,19.431) 13.183,19.431 19.691,12.923 19.691,12.353 19.907,12.136 C4_UART2_TX_FILTER.2
pads on no net: DISPLAY_CONN.CARD_CD DISPLAY_CONN.LITE DISPLAY_CONN.MISO DISPLAY_CONN.TFT_CS J2.1 J2.15 ROTARY_ENCODER_PEC12R.MH1 ROTARY_ENCODER_PEC12R.MH2
copper on no net:
  other v2: 4,44.2

## Polygon pours and split planes (outlines as drawn)
JETSON_GND on Top Layer "JETSON_GND_L01_P000" (solid, pour order 0): 0,0 0,60.1 100.1,60.1 100.1,0
JETSON_GND on Bottom Layer "JETSON_GND_L02_P001" (solid, pour order 1): 0,0 0,48 79,48 79,0

## Silkscreen, mask and mechanical layers (free items; w line width, h text height)
Top Overlay:
  lines w0.254: 7.856,31.749 26.67,31.749 26.67,46.863 7.856,46.863 7.856,31.749
  text "UI-V1.0 / UBC Thunderbots /  / Designer: / Liam Bontkes / Kenny Wakaba /  / December 3, 2021" at 8.255,32.131 h1.02
  text "CS0_FILTER" at 59.377,23.114 h1.02
  text "GND" at 4.699,22.352 h1.02 r90
  text "RX" at 6.185,22.352 h1.02 r90
  text "HB" at 7.67,22.352 h1.02 r90
  text "TX" at 9.156,22.352 h1.02 r90
  text "3V3" at 10.641,22.352 h1.02 r90
  text "CS1_FILTER" at 59.546,21.59 h1.02
  text "CS2_FILTER" at 59.377,20.066 h1.02
  text "CS3_FILTER" at 59.377,18.542 h1.02
  text "CS4_FILTER" at 59.377,17.018 h1.02
  text "CS5_FILTER" at 59.377,15.621 h1.02
  text "SCK_FILTER" at 59.377,14.224 h1.02
  text "MISO" at 65.471,12.827 h1.02
  text "MOSI_FILTER" at 58.53,11.176 h1.02
  text "EN_FILTER" at 60.393,9.652 h1.02
  text "CS5" at 13.9,8.3 h1.02 r90
  text "CS4" at 16.4,8.3 h1.02 r90
  text "CS3" at 19,8.3 h1.02 r90
  text "CS2" at 21.7,8.3 h1.02 r90
  text "GND" at 26.7,8.3 h1.02 r90
  text "SCK" at 29.24,8.3 h1.02 r90
  text "MISO" at 31.78,8.3 h1.02 r90
  text "MOSI" at 34.32,8.3 h1.02 r90
  text "3V3" at 36.86,8.3 h1.02 r90
  text "EN" at 39.4,8.3 h1.02 r90
  text "GND" at 47,8.3 h1.02 r90
  text "HB" at 49.4,8.3 h1.02 r90
  text "5" at 51.9,8.3 h1.02 r90
  text "3V3" at 57.1,8.3 h1.02 r90
  text "RST_FILTER" at 59.377,8.128 h1.02
  text "GND" at 7.62,5.842 h1.02 r90
  text "3V3" at 66.359,5.554 h1.02
  text "GND" at 66.359,3.854 h1.02
  text "40" at 7.62,1.626 h1.02 r90
  text "RX" at 47,1.143 h1.02 r90
  text "TX" at 49.5,1.143 h1.02 r90
  text "5V" at 54.8,1.143 h1.02 r90
  text "5V" at 57.2,1.143 h1.02 r90
  text "CS1" at 26.7,0.677 h1.02 r90
  text "GND" at 16.5,0.339 h1.02 r90
  text "RST" at 19.1,0.339 h1.02 r90
  text "GND" at 21.6,0.339 h1.02 r90
  text "CS0" at 29.2,0.339 h1.02 r90
  text "GND" at 34.3,0.339 h1.02 r90
  text "GND" at 41.9,0.339 h1.02 r90
  text "GND" at 52.1,0.339 h1.02 r90
Bottom Overlay:
  text "<-" at 34.036,15.748 h1
  text "<-------" at 38.111,13.931 h1
  text "<-----" at 21.59,13.716 h1
  text "<--" at 17.272,11.684 h1
  text "<----" at 33.655,11.684 h1
  text "<----------" at 37.846,9.906 h1
  text "<-------" at 21.59,9.652 h1
Mechanical 1:
  lines w0.254: 0,0 0,48 100.076,48 100.076,0 0,0